# Altium PCB futong.PcbDoc (part 1 of 2)
Units mil, origin at the board's own origin, x right, y up, seen from the top; angles counter-clockwise.
Board outline 6000 x 4000 mil, 4 copper layers (Top Layer, Layer 1, Layer 2, Bottom Layer), stack 23.756 mil thick; 90 components, 158 nets, 637 pads, 325 vias.
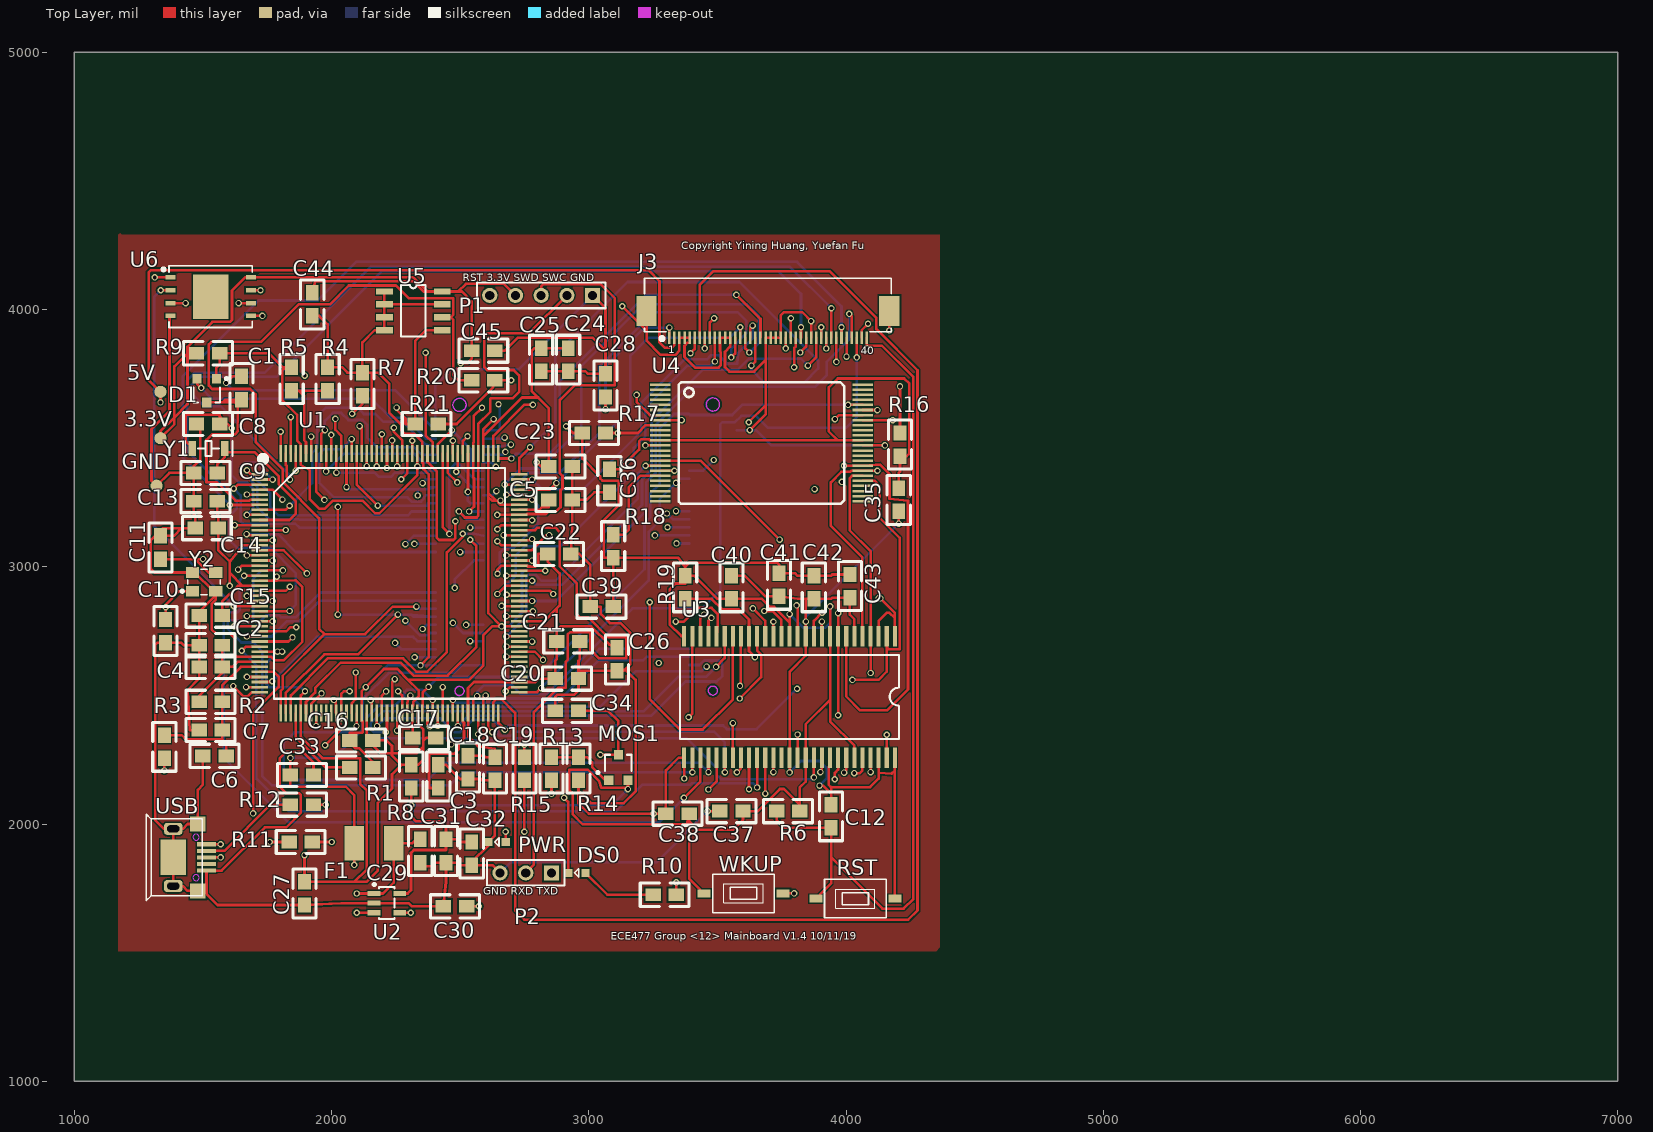
[diagram p0: Top Layer view]
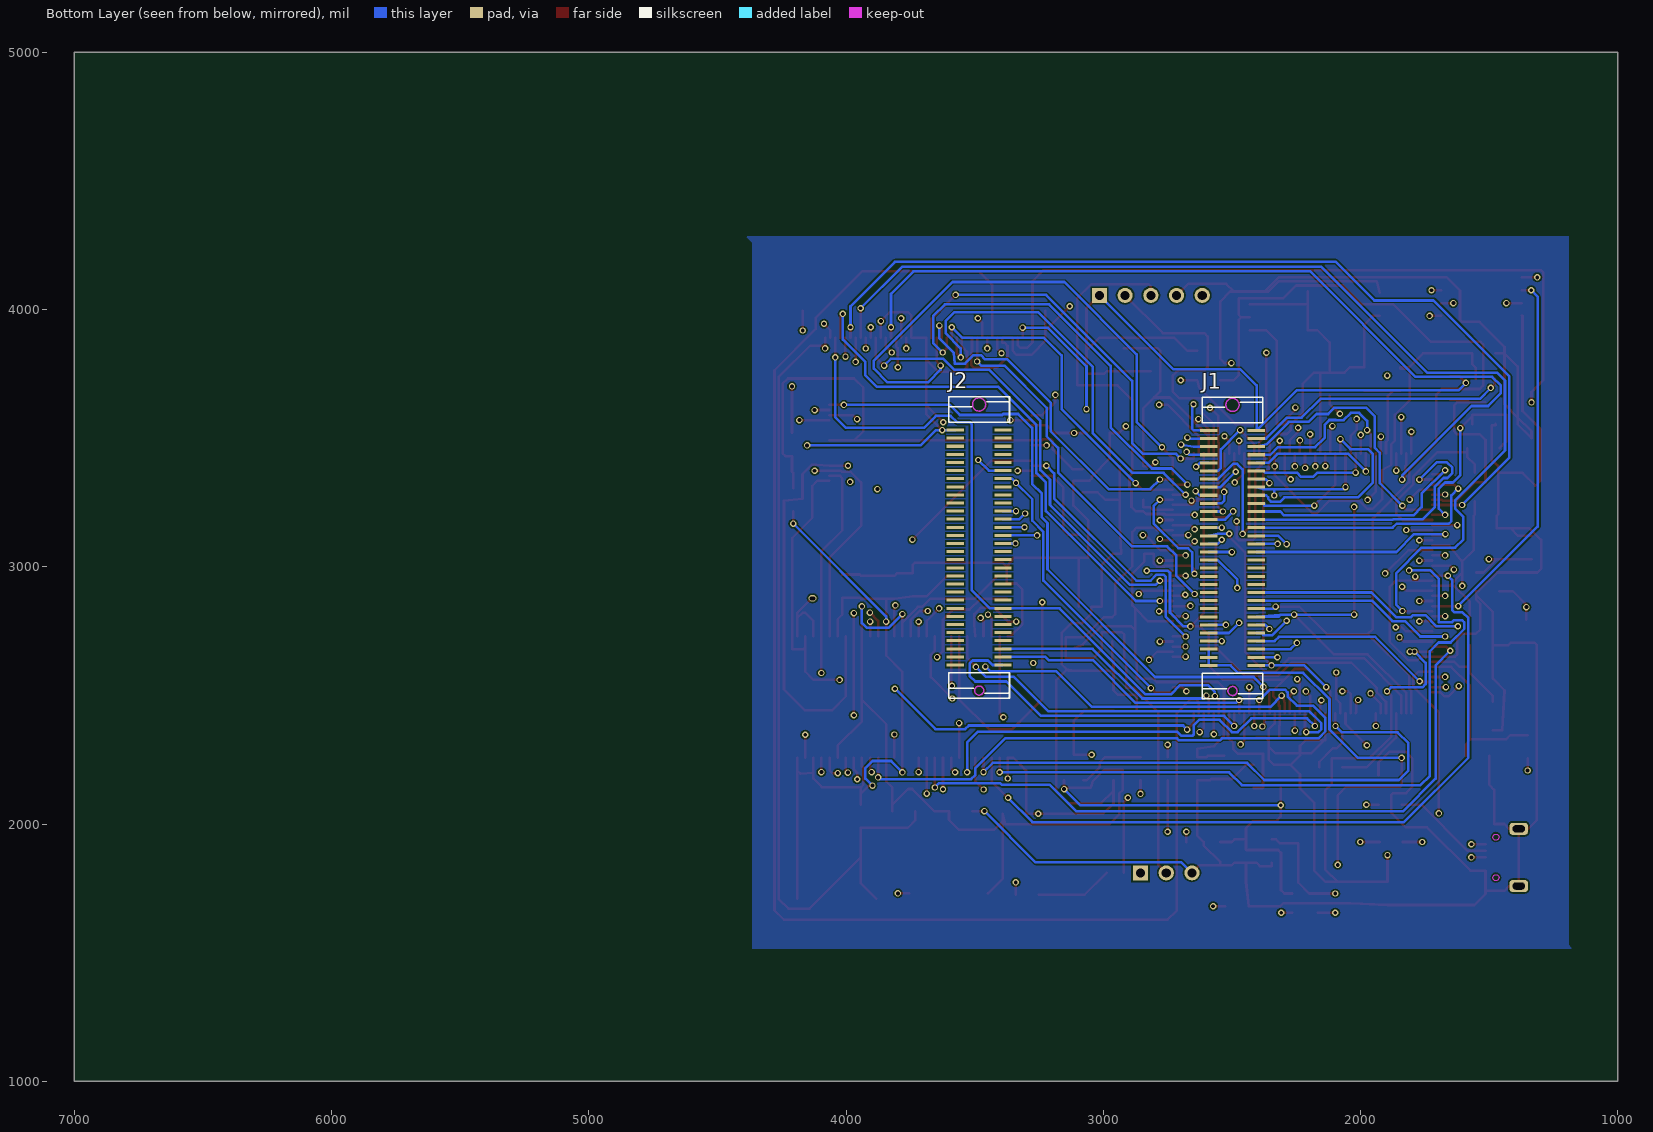
[diagram p1: Bottom Layer view, seen from below]
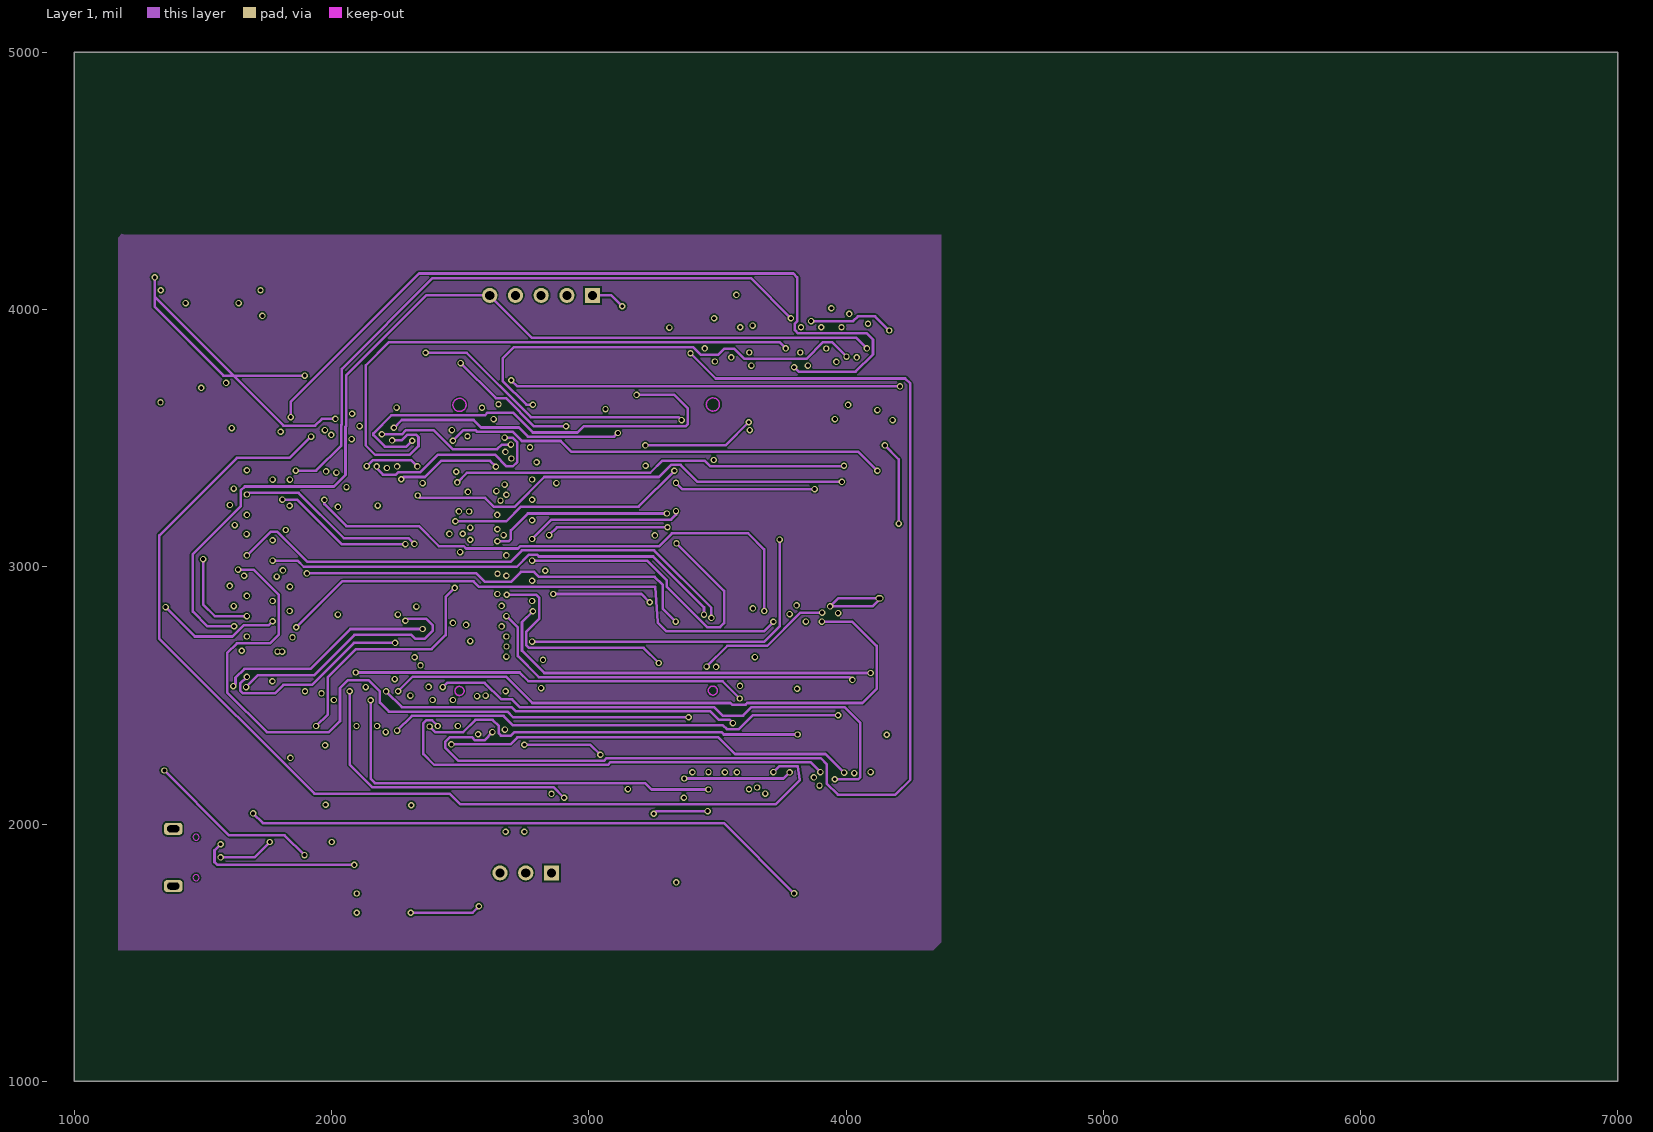
[diagram p2: Layer 1]
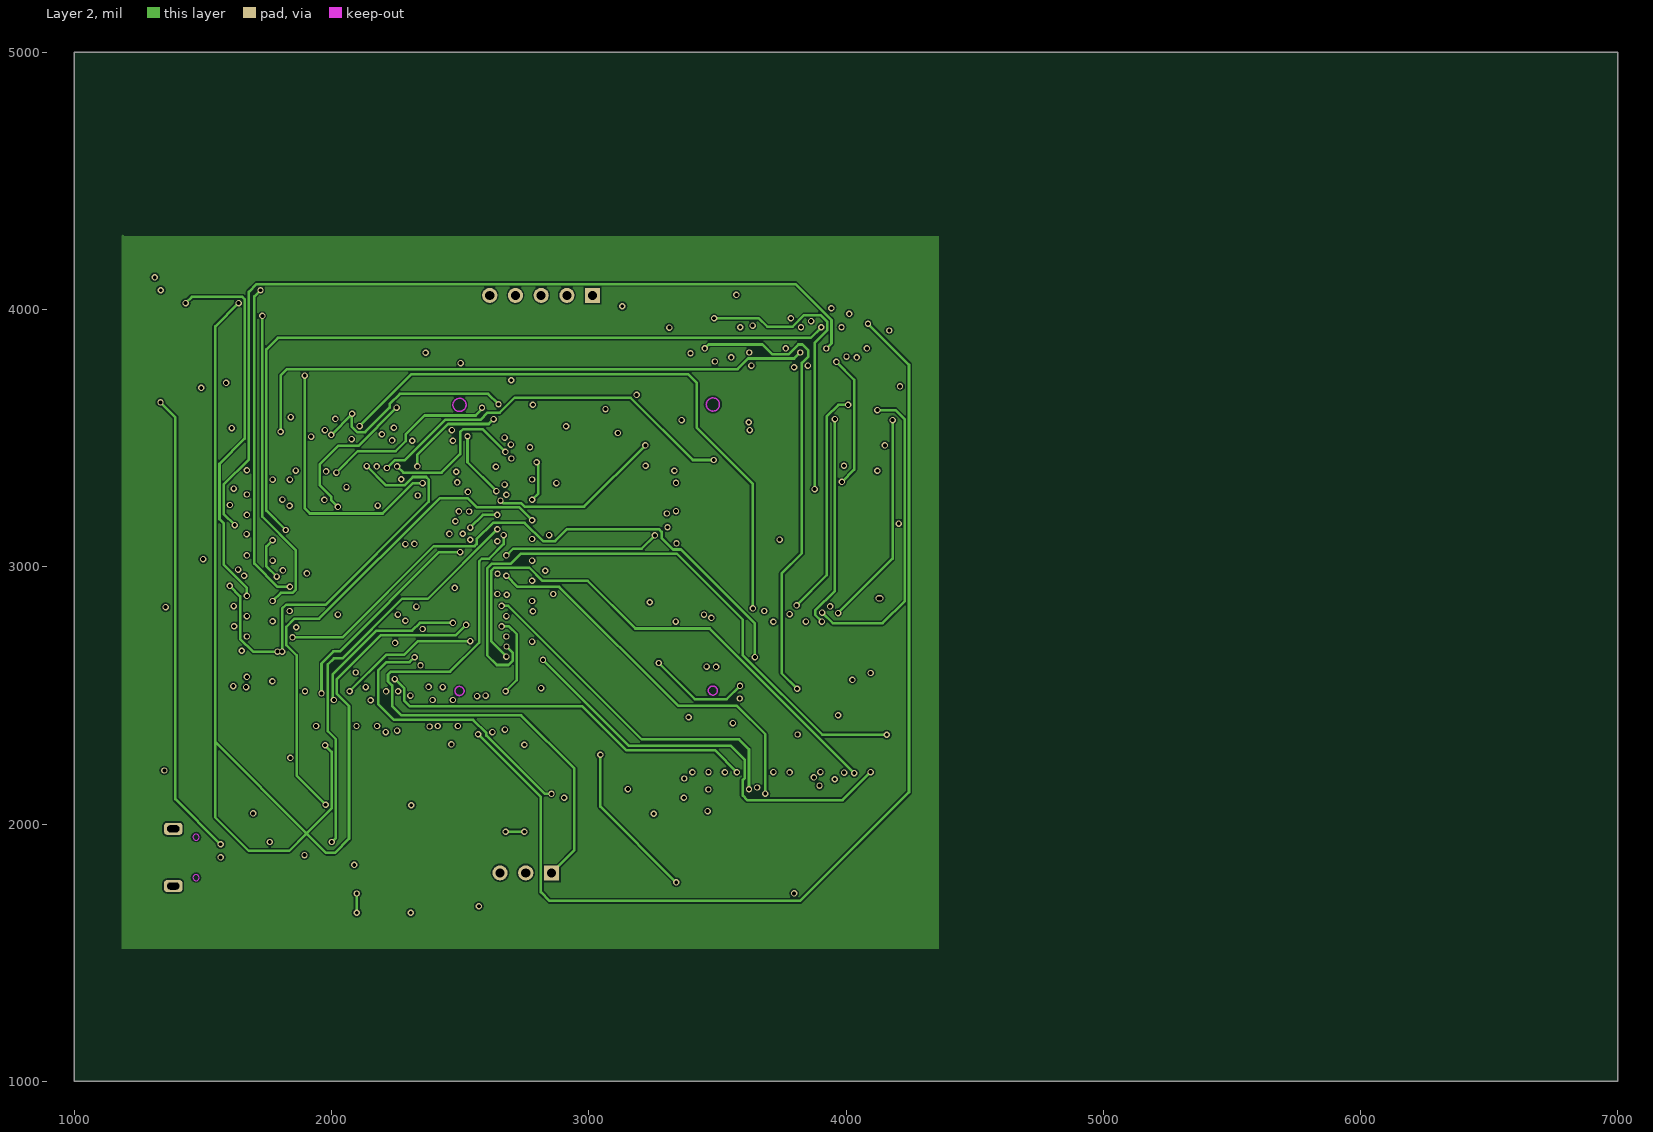
[diagram p3: Layer 2]

## Layer stack, top to bottom
Top Solder: solder mask 0.4, Solder Resist, Dk 3.5
Top Layer: signal copper 1.4
Dielectric 2: prepreg 2.8, PP-006, Dk 4.1
Layer 1: signal copper 1.3779
Dielectric 1: dielectric 12.6, FR-4, Dk 4.8
Layer 2: signal copper 1.3779
Dielectric 3: prepreg 2.8, PP-006, Dk 4.1
Bottom Layer: signal copper 1.4
Bottom Solder: solder mask 0.4, Solder Resist, Dk 3.5

## Board outline
1000,1000 7000,1000 7000,5000 1000,5000

## Design rules (kind name [scope] priority, off if disabled: settings)
Clearance [All] p1: gap=6 ignorepadtopadclearanceinfootprint=TRUE except(0: Arc-Hole Track-Hole SMDPad-Hole THPad-Hole Via-Hole Fill-Hole Poly-Hole Region-Hole Text-Hole)
ComponentClearance [All] p1 off: gap=10 collisioncheckmode=3 verticalgap=10 showdistances=FALSE
DiffPairsRouting [All] p1 off: maxlimit=10 minlimit=10 mostfreqgap=10 toplayer_minwidth=15 toplayer_maxwidth=15 toplayer_prefwidth=15 midlayer1_minwidth=15 midlayer1_maxwidth=15 midlayer1_prefwidth=15 midlayer2_minwidth=15 midlayer2_maxwidth=15 midlayer2_prefwidth=15 bottomlayer_minwidth=15 bottomlayer_maxwidth=15 bottomlayer_prefwidth=15 maxuncoupledlength=500
FanoutControl Fanout_BGA [IsBGA] p1 off: bgadir=Out bgaviamode=Centered fanoutstyle=Auto fanoutdirection=Alternating viagrid=1 // Fanout_BGA (Default Rule)
FanoutControl Fanout_LCC [IsLCC] p2 off: bgadir=Out bgaviamode=Centered fanoutstyle=Auto fanoutdirection=Alternating viagrid=1 // Fanout_LCC (Default Rule)
FanoutControl Fanout_SOIC [IsSOIC] p3 off: bgadir=Out bgaviamode=Centered fanoutstyle=Auto fanoutdirection=Alternating viagrid=1 // Fanout_SOIC (Default Rule)
FanoutControl Fanout_Small [(CompPinCount < 5)] p4 off: bgadir=Out bgaviamode=Centered fanoutstyle=Auto fanoutdirection=OutThenIn viagrid=1 // Fanout_Small (Default Rule)
FanoutControl Fanout_Default [All] p5 off: bgadir=Out bgaviamode=Centered fanoutstyle=Auto fanoutdirection=Alternating viagrid=1 // Fanout_Default (Default Rule)
Height [All] p1 off: minheight=0 maxheight=1000 prefheight=500
ParallelSegment ParallelSegment_1 [InNetClass('fmc') vs InNetClass('fmc')] p1: limit=10000 gap=10
ParallelSegment ParallelSegment_2 [InNetClass('qspi') vs InNetClass('qspi')] p2: limit=10000 gap=10
ParallelSegment [InNetClass('dcmi') vs InNetClass('dcmi')] p3: limit=10000 gap=10
ParallelSegment ParallelSegment_3 [InNetClass('spi4') vs InNetClass('spi4')] p4: limit=10000 gap=10
PolygonConnect [All] p1: connectstyle=Relief reliefconductorwidth=10 reliefentries=4 polygonreliefangle="90 Angle" airgapwidth=10
RoutingCorners [All] p1 off: cornerstyle=45-Degree minsetback=100 maxsetback=100
RoutingPriority [All] p1 off: routingpriority=0
RoutingTopology [All] p1 off: topology=Shortest
RoutingVias [All] p1: holewidth=15 width=25 viastyle="Through Hole" minholewidth=15 minwidth=25 maxholewidth=15 maxwidth=25
SMDToCorner [All] p1: distance=0
SolderMaskExpansion [All] p1: expansion=4
Width [All] p1: maxlimit=10 minlimit=10 preferedwidth=10
19 further rules are at their usual default settings.

## Classes and differential pairs
net class fmc: FMC_A0 FMC_A1 FMC_A2 FMC_A3 FMC_A4 FMC_A5 FMC_A6 FMC_A7 FMC_A8 FMC_A9 FMC_A10 FMC_A11 FMC_A12 FMC_A16_CLE FMC_A17_ALE FMC_BA0 FMC_BA1 FMC_D0 FMC_D1 FMC_D2 FMC_D3 FMC_D4 FMC_D5 FMC_D6 FMC_D7 FMC_D8 FMC_D9 FMC_D10 FMC_D11 FMC_D12 FMC_D13 FMC_D14 FMC_D15 FMC_NBL0 FMC_NBL1 FMC_NCE3 FMC_NE1 FMC_NOE FMC_NWAIT FMC_NWE FMC_SDCKE0 FMC_SDCLK FMC_SDNCAS FMC_SDNE0 FMC_SDNRAS FMC_SDNWE
net class spi4: PE2 PE4 PE5 PE6
net class qspi: PB2 PB6 PF6 PF7 PF8 PF9
net class dcmi: DCMI_D0 DCMI_D1 DCMI_D2 DCMI_D3 DCMI_D4 DCMI_D5 DCMI_D6 DCMI_D7 DCMI_HREF DCMI_PLCK DCMI_SCL DCMI_SDA DCMI_XCLK
component class stm: C1 C2 C3 C4 C5 C6 C7 C8 C9 C10 C11 C12 C13 C14 C15 C16 C17 C18 C19 C20 C21 C22 C23 C24 C25 C26 C27 D1 J1 J2 P1 R1 R2 R3 R4 R5 R6 R7 R8 R9 RST U1 Y1 Y2
component class mem: C35 C36 C37 C38 C39 C40 C41 C42 C43 C44 C45 R16 R17 R18 R19 R20 R21 U3 U4 U5 U6
component class circuit: 3.3V 5V C28 C29 C30 C31 C32 C33 C34 DS0 F1 GND J3 MOS1 P2 PWR R10 R11 R12 R13 R14 R15 U2 USB WKUP

## Components (designator, comment, footprint, x,y, rotation, side; value= is the part's Value field where it differs from the comment)
3.3V "TEST POINT" TP-1.5 1335,3500 r90 top
5V "TEST POINT" TP-1.5 1335,3680 r0 top
C1 "104" 0805 1649.94,3650 r90 top
C2 "104" 0805 1485,2695.06 r0 top
C3 "225" 0805 2415,2140 r90 top
C4 "225" 0805 1485,2611.05 r0 top
C5 "225" 0805 2845,3260.06 r0 top
C6 "10uF" 0805 1500,2265.06 r0 top
C7 "104" 0805 1485,2365.06 r0 top
C8 "6pF" 0805 1475,3555 r0 top
C9 "6pF" 0805 1465,3365.06 r0 top
C10 "22pF" 0805 1354.94,2705 r90 top
C11 "22pF" 0805 1335,3120 r270 top
C12 "104" 0805 3942.02,1985 r90 top
C13 "104" 0805 1464.94,3255 r0 top
C14 "104" 0805 1470,3150.06 r0 top
C15 "104" 0805 1485,2810.06 r0 top
C16 "104" 0805 2070,2325.06 r0 top
C17 "104" 0805 2315,2335.06 r0 top
C18 "104" 0805 2530,2175 r90 top
C19 "104" 0805 2634.94,2170 r90 top
C20 "104" 0805 2960,2564.94 r180 top
C21 "104" 0805 2965,2710 r180 top
C22 "104" 0805 2930,3049.94 r180 top
C23 "104" 0805 2935,3390 r180 top
C24 "104" 0805 2919.94,3760 r90 top
C25 "104" 0805 2815,3760 r90 top
C26 "104" 0805 3109.94,2595 r90 top
C27 "104" 0805 1894.94,1685 r90 top
C28 "104" 0805 3065,3750 r270 top
C29 "10uF" 0805 2344.94,1850 r90 top
C30 "103" 0805 2435,1680.06 r0 top
C31 "104" 0805 2444.94,1850 r90 top
C32 "10uF" 0805 2544.94,1840 r90 top
C33 "104" 0805 1840,2190.06 r0 top
C34 "104" 0805 2960,2439.94 r180 top
C35 "104" 0805 4204.94,3215 r90 top
C36 "104" 0805 3079.94,3289.37 r90 top
C37 "104" 0805 3509.53,2050.06 r0 top
C38 "104" 0805 3300,2040.06 r0 top
C39 "104" 0805 3005,2845.06 r0 top
C40 "104" 0805 3555.06,2965 r270 top
C41 "104" 0805 3739.98,2885 r90 top
C42 "104" 0805 3874.94,2875 r90 top
C43 "104" 0805 4015,2880 r90 top
C44 "104" 0805 1925.06,4065 r270 top
C45 "104" 0805 2545,3840.06 r0 top
D1 "BAT54C" SOT-23 1515,3690 r180 top
DS0 "LED" SMDLED-0603 2986.93,1810 r180 top
F1 "1812L075PR" *1812 2165,1925 r0 top
GND "TEST POINT" TP-1.5 1320,3315 r90 top
J1 "3710M060046G3FT01" 3710F060046G3FT01 2590,2616.54 r0 bottom
J2 "3710M060046G3FT01" 3710F060046G3FT01 3575.04,2618.07 r0 bottom
J3 "RGBLCD" FPC-TOP40 3313.19,3886 r0 top
MOS1 "SI2301" SO-G3/C2.5 3115,2220 r0 top
P1 "SWD" HDR1X5 3015,4055 r180 top
P2 "USART1" HDR1X3 2855,1810 r180 top
PWR "LED" SMDLED-0603 2676.93,1930 r180 top
R1 "10K" 0805 2070,2220.06 r0 top
R2 "10R" 0805 1485,2475.06 r0 top
R3 "10R" 0805 1350.06,2345 r270 top
R4 "0R" 0805 1984.94,3685 r90 top
R5 "0R" 0805 1844.87,3685 r90 top
R6 "10K" 0805 3730,2050 r0 top
R7 "100K" 0805 2119.94,3665 r90 top
R8 "0R" 0805 2309.94,2140 r90 top
R9 "0R" 0805 1475,3830 r0 top
R10 "1K" 0805 3340,1724.94 r180 top
R11 "10R" 0805 1925,1929.94 r180 top
R12 "10R" 0805 1930,2074.94 r180 top
R13 "10R" 0805 2854.94,2170 r90 top
R14 "100K" 0805 2959.94,2170 r90 top
R15 "1K" 0805 2749.94,2170 r90 top
R16 "0R" 0805 4209.94,3430 r90 top
R17 "10K" 0805 2975,3520.06 r0 top
R18 "10K" 0805 3095.06,3125 r270 top
R19 "10K" 0805 3375,2965 r270 top
R20 "4.7K" 0805 2545,3725.06 r0 top
R21 "4.7K" 0805 2325,3555.06 r0 top
RST "KEY_M" KEY_SOP3625 3882.91,1710 r0 top
U1 "STM32F767IGT6" LQFP176 1720.91,3358.98 r0 top
U2 "CAT6219-330TD" SOT-23-5 2165,1729.8 r0 top
U3 "W9825G6KH" TSOP54 4189.96,2730 r270 top
U4 "MT29F4G08" TSOP48 3277.6,3707.79 r0 top
U5 "24C02" SOP-8 2205.59,4070 r0 top
U6 "W25Q256" WSON8 1530,4050 r0 top
USB "USB-AB" "USB_AB - 5S - B" 1300,1870 r90 top
WKUP "KEY_UP" KEY_SOP3625 3755,1730 r180 top
Y1 "32.768KHz" XTAL3215 1459.02,3460 r0 top
Y2 "25Mhz" XTAL3225 1459.45,2905 r0 top

## Footprints (in the part's own frame and the unit in brackets; to place one, negate y for a bottom-side part, rotate by r counter-clockwise, add the part's x,y. Pads: shape width x height; smd on the part's side, far side on the other; paste and mask are expansions set on the pad)
0805 [mil]
  rect 60x50 smd: 1(0,-0.06) 2(90,-0.06)
  silkscreen extent -50,-45 140,45
3710F060046G3FT01 [mm]
  rect 1.7x0.3 smd: 1(-4.7,0) 2(-4.7,-0.8) 3(-4.7,-1.6) 4(-4.7,-2.4) 5(-4.7,-3.2) 6(-4.7,-4) 7(-4.7,-4.8) 8(-4.7,-5.6) 9(-4.7,-6.4) 10(-4.7,-7.2) 11(-4.7,-8) 12(-4.7,-8.8) 13(-4.7,-9.6) 14(-4.7,-10.4) 15(-4.7,-11.2) 16(-4.7,-12) 17(-4.7,-12.8) 18(-4.7,-13.6) 19(-4.7,-14.4) 20(-4.7,-15.2) 21(-4.7,-16) 22(-4.7,-16.8) 23(-4.7,-17.6) 24(-4.7,-18.4) 25(-4.7,-19.2) 26(-4.7,-20) 27(-4.7,-20.8) 28(-4.7,-21.6) 29(-4.7,-22.4) 30(-4.7,-23.2) 31(0,-23.2) 32(0,-22.4) 33(0,-21.6) 34(0,-20.8) 35(0,-20) 36(0,-19.2) 37(0,-18.4) 38(0,-17.6) 39(0,-16.8) 40(0,-16) 41(0,-15.2) 42(0,-14.4) 43(0,-13.6) 44(0,-12.8) 45(0,-12) 46(0,-11.2) 47(0,-10.4) 48(0,-9.6) 49(0,-8.8) 50(0,-8) 51(0,-7.2) 52(0,-6.4) 53(0,-5.6) 54(0,-4.8) 55(0,-4) 56(0,-3.2) 57(0,-2.4) 58(0,-1.6) 59(0,-0.8) 60(0,0)
  Keep-Out Layer circle w0.152: c-2.35,2.525 r0.45
  Keep-Out Layer circle w0.152: c-2.35,-25.725 r0.65
  silkscreen extent -5.35,-26.48 0.65,3.27
*1812 [mm]
  rect 1.9x3.4 smd: 1(-1.95,0) 2(1.95,0)
FPC-TOP40 [mm]
  rect 0.25x1.2 smd: 1(0,0.102) 2(0.5,0.102) 3(1,0.102) 4(1.5,0.102) 5(2,0.102) 6(2.5,0.102) 7(3,0.102) 8(3.5,0.102) 9(4,0.102) 10(4.5,0.102) 11(5,0.102) 12(5.5,0.102) 13(6,0.102) 14(6.5,0.102) 15(7,0.102) 16(7.5,0.102) 17(8,0.102) 18(8.5,0.102) 19(9,0.102) 20(9.5,0.102) 21(10,0.102) 22(10.5,0.102) 23(11,0.102) 24(11.5,0.102) 25(12,0.102) 26(12.5,0.102) 27(13,0.102) 28(13.5,0.102) 29(14,0.102) 30(14.5,0.102) 31(15,0.102) 32(15.5,0.102) 33(16,0.102) 34(16.5,0.102) 35(17,0.102) 36(17.5,0.102) 37(18,0.102) 38(18.5,0.102) 39(19,0.102) 40(19.5,0.102)
  rect 2x3 smd: A(-2.25,2.754) B(21.725,2.754)
  silkscreen extent -2.45,-0.15 21.92,5.97
HDR1X3 [mm]
  rect 1.5x1.5 hole 0.9: 1(0,0)
  round 1.5 hole 0.9: 2(2.54,0) 3(5.08,0)
  silkscreen extent -1.27,-1.27 6.35,1.27
HDR1X5 [mm]
  rect 1.5x1.5 hole 0.9: 1(0,0)
  round 1.5 hole 0.9: 2(2.54,0) 3(5.08,0) 4(7.62,0) 5(10.16,0)
  silkscreen extent -1.27,-1.27 11.43,1.27
KEY_SOP3625 [mm]
  rect 1.3x0.8 smd: 1(0,0) 2(7.8,0)
  silkscreen extent 0.85,-1.9 6.95,1.9
LQFP176 [mm]
  rect 1.65x0.254 smd: 1(0,0) 2(0,-0.5) 3(0,-1) 4(0,-1.5) 5(0,-2) 6(0,-2.5) 7(0,-3) 8(0,-3.5) 9(0,-4) 10(0,-4.5) 11(0,-5) 12(0,-5.5) 13(0,-6) 14(0,-6.5) 15(0,-7) 16(0,-7.5) 17(0,-8) 18(0,-8.5) 19(0,-9) 20(0,-9.5) 21(0,-10) 22(0,-10.5) 23(0,-11) 24(0,-11.5) 25(0,-12) 26(0,-12.5) 27(0,-13) 28(0,-13.5) 29(0,-14) 30(0,-14.5) 31(0,-15) 32(0,-15.5) 33(0,-16) 34(0,-16.5) 35(0,-17) 36(0,-17.5) 37(0,-18) 38(0,-18.5) 39(0,-19) 40(0,-19.5) 41(0,-20) 42(0,-20.5) 43(0,-21) 44(0,-21.5) 89(25.631,-21.5) 90(25.631,-21) 91(25.631,-20.5) 92(25.631,-20) 93(25.631,-19.5) 94(25.631,-19) 95(25.631,-18.5) 96(25.631,-18) 97(25.631,-17.5) 98(25.631,-17) 99(25.631,-16.5) 100(25.631,-16) 101(25.631,-15.5) 102(25.631,-15) 103(25.631,-14.5) 104(25.631,-14) 105(25.631,-13.5) 106(25.631,-13) 107(25.631,-12.5) 108(25.631,-12) 109(25.631,-11.5) 110(25.631,-11) 111(25.631,-10.5) 112(25.631,-10) 113(25.631,-9.5) 114(25.631,-9) 115(25.631,-8.5) 116(25.631,-8) 117(25.631,-7.5) 118(25.631,-7) 119(25.631,-6.5) 120(25.631,-6) 121(25.631,-5.5) 122(25.631,-5) 123(25.631,-4.5) 124(25.631,-4) 125(25.631,-3.5) 126(25.631,-3) 127(25.631,-2.5) 128(25.631,-2) 129(25.631,-1.5) 130(25.631,-1) 131(25.631,-0.5) 132(25.631,0)
  rect 0.254x1.65 smd: 45(2.065,-23.566) 46(2.566,-23.566) 47(3.066,-23.566) 48(3.565,-23.566) 49(4.066,-23.566) 50(4.565,-23.566) 51(5.066,-23.566) 52(5.565,-23.566) 53(6.066,-23.566) 54(6.565,-23.566) 55(7.066,-23.566) 56(7.565,-23.566) 57(8.066,-23.566) 58(8.565,-23.566) 59(9.066,-23.566) 60(9.565,-23.566) 61(10.066,-23.566) 62(10.565,-23.566) 63(11.066,-23.566) 64(11.565,-23.566) 65(12.066,-23.566) 66(12.565,-23.566) 67(13.066,-23.566) 68(13.565,-23.566) 69(14.066,-23.566) 70(14.565,-23.566) 71(15.066,-23.566) 72(15.566,-23.566) 73(16.066,-23.566) 74(16.566,-23.566) 75(17.065,-23.566) 76(17.566,-23.566) 77(18.065,-23.566) 78(18.566,-23.566) 79(19.065,-23.566) 80(19.566,-23.566) 81(20.065,-23.566) 82(20.566,-23.566) 83(21.065,-23.566) 84(21.566,-23.566) 85(22.065,-23.566) 86(22.566,-23.566) 87(23.065,-23.566) 88(23.566,-23.566) 133(23.566,2.065) 134(23.065,2.065) 135(22.566,2.065) 136(22.065,2.065) 137(21.566,2.065) 138(21.065,2.065) 139(20.566,2.065) 140(20.065,2.065) 141(19.566,2.065) 142(19.065,2.065) 143(18.566,2.065) 144(18.065,2.065) 145(17.566,2.065) 146(17.065,2.065) 147(16.566,2.065) 148(16.066,2.065) 149(15.566,2.065) 150(15.066,2.065) 151(14.565,2.065) 152(14.066,2.065) 153(13.565,2.065) 154(13.066,2.065) 155(12.565,2.065) 156(12.066,2.065) 157(11.565,2.065) 158(11.066,2.065) 159(10.565,2.065) 160(10.066,2.065) 161(9.565,2.065) 162(9.066,2.065) 163(8.565,2.065) 164(8.066,2.065) 165(7.565,2.065) 166(7.066,2.065) 167(6.565,2.065) 168(6.066,2.065) 169(5.565,2.065) 170(5.066,2.065) 171(4.565,2.065) 172(4.066,2.065) 173(3.565,2.065) 174(3.066,2.065) 175(2.566,2.065) 176(2.065,2.065)
  silkscreen extent 0.04,-22.15 24.22,1.82
SMDLED-0603 [mil]
  rect 32x32 smd: 1(0,0) 2(66.93,0)
  silkscreen extent 26,-17 42,17
SO-G3/C2.5 [mm]
  rect 0.9x0.95 smd: 1(-0.95,-1.25) 2(0.95,-1.25) 3(0,1.25)
  silkscreen extent -2.15,-0.63 1.3,1.25
SOP-8 [mil]
  rect 65x25 smd: 1(0,0) 2(0,-50) 3(0,-100) 4(0,-150) 5(224.41,-150) 6(224.41,-100) 7(224.41,-50) 8(224.41,0)
  silkscreen extent 65,-175 159,25
SOT-23 [mm]
  rect 0.9x0.95 smd: 1(-0.95,-1.048) 2(0.95,-1.048) 3(0,1.302)
  silkscreen extent -2.07,-1.17 1.3,1.3
SOT-23-5 [mil]
  rect 50x20 smd: 1(0,0) 2(0,-37.4) 3(0,-74.8) 4(100,-74.8) 5(100,0)
  silkscreen extent 0,-99 80,35
TP-1.5 [mm]
  round 1.2 smd: 1(0,0)
TSOP48 [mm]
  rect 2x0.25 smd: 1(0,0) 2(0,-0.5) 3(0,-1) 4(0,-1.5) 5(0,-2) 6(0,-2.5) 7(0,-3) 8(0,-3.5) 9(0,-4) 10(0,-4.5) 11(0,-5) 12(0,-5.5) 13(0,-6) 14(0,-6.5) 15(0,-7) 16(0,-7.5) 17(0,-8) 18(0,-8.5) 19(0,-9) 20(0,-9.5) 21(0,-10) 22(0,-10.5) 23(0,-11) 24(0,-11.5) 25(20,-11.5) 26(20,-11) 27(20,-10.5) 28(20,-10) 29(20,-9.5) 30(20,-9) 31(20,-8.5) 32(20,-8) 33(20,-7.5) 34(20,-7) 35(20,-6.5) 36(20,-6) 37(20,-5.5) 38(20,-5) 39(20,-4.5) 40(20,-4) 41(20,-3.5) 42(20,-3) 43(20,-2.5) 44(20,-2) 45(20,-1.5) 46(20,-1) 47(20,-0.5) 48(20,0)
  silkscreen extent 1.83,-11.75 18.17,0.25
TSOP54 [mm]
  rect 2x0.4 smd: 1(0,0) 2(0,-0.8) 3(0,-1.6) 4(0,-2.4) 5(0,-3.2) 6(0,-4) 7(0,-4.8) 8(0,-5.6) 9(0,-6.4) 10(0,-7.2) 11(0,-8) 12(0,-8.8) 13(0,-9.6) 14(0,-10.4) 15(0,-11.2) 16(0,-12) 17(0,-12.8) 18(0,-13.6) 19(0,-14.4) 20(0,-15.2) 21(0,-16) 22(0,-16.8) 23(0,-17.6) 24(0,-18.4) 25(0,-19.2) 26(0,-20) 27(0,-20.8) 28(12,-20.8) 29(12,-20) 30(12,-19.2) 31(12,-18.4) 32(12,-17.6) 33(12,-16.8) 34(12,-16) 35(12,-15.2) 36(12,-14.4) 37(12,-13.6) 38(12,-12.8) 39(12,-12) 40(12,-11.2) 41(12,-10.4) 42(12,-9.6) 43(12,-8.8) 44(12,-8) 45(12,-7.2) 46(12,-6.4) 47(12,-5.6) 48(12,-4.8) 49(12,-4) 50(12,-3.2) 51(12,-2.4) 52(12,-1.6) 53(12,-0.8) 54(12,0)
  silkscreen extent 1.83,-21.2 10.16,0.4
"USB_AB - 5S - B" [mm]
  rect 0.4x1.9 smd: 1(1.3,-5.436) 2(0.65,-5.436) 3(0,-5.436) 4(-0.65,-5.436) 5(-1.3,-5.436)
  rrect50% 1.2x1.8 hole 0.7 slot 1.2 at 90 deg: 6(2.825,-2.15) 7(-2.825,-2.15)
  rect 1.5x1.5 smd: 8(-3.302,-4.572) 9(3.302,-4.572)
  rect 3.5x2.5 smd: 9(0,-2.159)
  Keep-Out Layer circle w0.102: c-2,-4.4 r0.3
  Keep-Out Layer circle w0.102: c2,-4.4 r0.3
  silkscreen extent -4.26,-5 4.26,0.51
WSON8 [mm]
  rect 1x0.45 smd: 1(-3.975,1.905) 2(-3.975,0.635) 3(-3.975,-0.635) 4(-3.975,-1.905) 5(3.975,-1.905) 6(3.975,-0.635) 7(3.975,0.635) 8(3.975,1.905)
  rect 3.5x4.4 smd: 9(0,0)
  silkscreen extent -4.8,-3.05 4.1,3.05
XTAL3215 [mm]
  rect 0.75x1.5 smd: 1(0,0) 2(3.2,0)
  silkscreen extent -0.74,-0.75 3.94,0.75
XTAL3225 [mm]
  rect 1.3x1.05 smd: 1(0,0) 2(2.3,0) 3(2.3,1.85) 4(0,1.85)
  silkscreen extent -1.14,-0.33 2.74,2.17

## Part data
3.3V 5V GND: library part TEST-POINT, "测试点"
C1 C2 C3 C4 C5 C6 C7 C8 C9 C10 C11 C12 C13 C14 C15 C16 C17 C18 C19 C20 C21 C22 C23 C24 C25 C26 C27 C28 C29 C30 C31 C32 C33 C34 C35 C36 C37 C38 C39 C40 C41 C42 C43 C44 C45: library part C
D1: "双肖特基二极管"
F1: "PTC Resettable Fuse 0.75A_hold_ 1.5A_trip_ 13.2VDC 100A 0.8W 0.2s 0.1Ohm SMD Solder Pad 1812 T/R", Package="1812 Littelfuse", Availability=Unavailable, MF="Littelfuse Inc.", MP=1812L075PR, Price=None, SnapEDA_Link=https://www.snapeda.com/parts/1812L075PR/Littelfuse%20Inc./view-part/?ref=snap
J1 J2: library part 3710F, "3710F060046G3FT01"
J3: library part FPC-40, "FPC-40P-0.5mm"
MOS1: library part MOS-P, "IRLML6401/SI2301"
P1: library part "Header 5", "Header, 5-Pin", LatestRevisionDate=17-Jul-2002, LatestRevisionNote="Re-released for DXP Platform.", Publisher="Altium Limited"
P2: library part "Header 3", "Header, 3-Pin", LatestRevisionDate=17-Jul-2002, LatestRevisionNote="Re-released for DXP Platform.", Publisher="Altium Limited"
R1 R2 R3 R4 R5 R6 R7 R8 R9 R10 R11 R12 R13 R14 R15 R16 R17 R18 R19 R20 R21: library part R
U2: "3.3V 500mA LDO"
U3: library part IS42S16160B, "32MB SDRAM"
U4: library part K9F2G08U0C, "256MB NAND FLASH"
U5: library part 24C256, "EEPROM"
U6: library part W25Q128, "W25Q128"
USB: "MicroUSB"
WKUP: library part KEY_M
Y1: library part XTAL, "普通晶振"
Y2: library part XTAL_3225, "3225贴片无源晶振"

## Via types
v1: diameter 25, hole 15, Top Layer to Bottom Layer, 325 vias

## Nets (pads, with @x,y where several pads share a name; then routed paths per layer and width w, separated by ;. In a path a pad name is that pad's centre, name@x,y a point inside that pad or via, vN(x,y) a via of type N, cw(c..) or ccw(c..) an arc to the next point about the centre after c; other vN are vias at no path point)
BOOT0: J1.31 R7.1 U1.166 | length 1164.2
  Top Layer w10: U1.166@1999.08,3440.29 v1(1999.08,3512.58) ; v1(2080,3595) 2080,3593.5 2120,3633.5 R7.1@2120,3665
  Layer 2 w10: v1(1999.08,3512.58) 2080,3593.5 v1(2080,3595) 2083.55,3595 2077.82,3589.27 2077.82,3544.95 2099.27,3523.5 2130.5,3523.5 2225.8,3618.8 2225.8,3632 2265.8,3672 2609,3672 v1(2649,3632)
  Bottom Layer w10: J1.31@2590,3529.92 2647.88,3529.92 2653.95,3535.99 2653.95,3627.05 v1(2649,3632)
DCMI_D0: J2.16 U1.115 | length 1360.4
  Top Layer w10: U1.115@2730,3024.33 2779.67,3024.33 v1(2780,3024)
  Layer 1 w10: v1(2780,3024) 3226.92,3024 3303.59,2947.33 3303.59,2921.97 3460.06,2765.5 3510.55,2765.5 3526,2780.95 3526,2905.98 v1(3340.98,3091)
  Bottom Layer w10: v1(3340.98,3091) 3341.46,3090.51 J2.16@3390,3090.51
DCMI_D1: J2.17 U1.116 | length 792.3
  Top Layer w10: v1(2680,3044.02) U1.116@2730,3044.02
  Layer 2 w10: v1(2680,3044.02) 2705.98,3070 3204.99,3070 v1(3257,3122.01)
  Bottom Layer w10: v1(3257,3122.01) J2.17@3390,3122.01
DCMI_D2: J2.18 U1.117 | length 697.2
  Top Layer w10: U1.117@2730,3063.7 2776.7,3063.7 2836,3123 v1(2846,3123)
  Layer 1 w10: v1(2846,3123) 2876.5,3153.5 v1(3306,3153.5)
  Bottom Layer w10: v1(3306,3153.5) J2.18@3390,3153.5
DCMI_D3: J2.19 U1.118 | length 909.6
  Top Layer w10: v1(2645,3099) 2660.61,3083.39 U1.118@2730,3083.39
  Layer 1 w10: v1(2645,3099) 2688,3099 2697,3108 2697,3141 2763,3207 v1(3304,3207)
  Bottom Layer w10: v1(3304,3207) 3326,3185 J2.19@3390,3185
DCMI_D4: J1.39 U1.140 | length 391.9
  Top Layer w10: U1.140@2510.89,3440.29 2510.89,3489.47 v1(2528.71,3507.29)
  Layer 2 w10: v1(2528.71,3507.29) 2528.71,3406.24 v1(2641,3293.95)
  Bottom Layer w10: J1.39@2590,3277.95 2625,3277.95 v1(2641,3293.95)
DCMI_D5: J1.36 U1.145 | length 343.6
  Top Layer w10: U1.145@2412.46,3440.29 2412.46,3475.46 v1(2468,3531)
  Bottom Layer w10: v1(2468,3531) 2542.67,3456.33 2542.67,3384.33 2554.56,3372.44 J1.36@2590,3372.44
DCMI_D6: J1.26 U1.167 | length 538.1
  Top Layer w10: v1(1979,3371) 1979.39,3371.39 U1.167@1979.39,3440.29
  Bottom Layer w10: v1(1979,3371) 2047,3439 2322.94,3439 2358,3403.94 J1.26@2404.96,3403.94
DCMI_D7: J1.27 U1.168 | length 674.3
  Top Layer w10: U1.168@1959.71,3440.29 1959.71,3516.71 v1(1974,3531)
  Bottom Layer w10: v1(1974,3531) 1974,3567.23 2005.27,3598.5 2037.45,3598.5 2065.95,3570 2095.68,3570 2096.18,3570.5 2121.06,3570.5 2139.56,3552 2139.56,3501.44 2176,3465 2320.43,3465 2350,3435.43 J1.27@2404.96,3435.43
DCMI_HREF: J2.3 U1.85 | length 947.3
  Top Layer w10: U1.85@2589.63,2431.2 2589.63,2489.63 v1(2599,2499)
  Bottom Layer w10: v1(2599,2499) 2610.06,2487.94 2847.86,2487.94 3040.98,2681.06 J2.3@3390,2681.06
DCMI_PLCK: J1.47 U1.52 | length 1157.2
  Top Layer w10: v1(1940,2381) U1.52@1940.02,2431.2
  Layer 1 w10: v1(1940,2381) 1985.5,2426.5 1985.5,2570.65 2094.52,2679.67 2388.67,2679.67 2443.4,2734.4 2443.4,2882.38 v1(2478.78,2917.77)
  Bottom Layer w10: v1(2478.78,2917.77) 2478.78,2949.77 2555,3025.99 J1.47@2590,3025.99
DCMI_RESET: J1.25 J1.41 U1.138 U1.165 | length 1647.2
  Top Layer w10: v1(2018.76,3366) U1.165@2018.76,3440.29 ; v1(2535,3214.96) 2553.87,3233.83 2553.87,3343.38 2550.26,3347 U1.138@2550.26,3440.29 2550.26,3481.84 2552.21,3483.79 2552.21,3585.21 v1(2585,3618)
  Layer 2 w10: v1(2018.76,3366) 2101.76,3449 2249,3449 2288,3488 2288,3514 2362,3588 2560,3588 2585,3613 v1(2585,3618)
  Bottom Layer w10: v1(2018.76,3366) 2167.43,3366 2183.74,3349.69 2230.74,3349.69 2247.06,3366 2370.56,3366 2377,3372.44 J1.25@2404.96,3372.44 ; v1(2535,3214.96) J1.41@2590,3214.96
DCMI_SCL: J1.22 U1.162 | length 813.1
  Top Layer w10: U1.162@2077.82,3440.29 v1(2077.82,3496)
  Bottom Layer w10: v1(2077.82,3496) 2038.82,3457 1970,3457 1953,3440 1953,3326 2009.5,3269.5 2295.5,3269.5 2311.5,3253.5 2348,3253.5 2358.5,3264 2358.5,3269.5 2366.95,3277.95 J1.22@2404.96,3277.95
DCMI_SDA: J1.21 U1.161 | length 471.2
  Top Layer w10: U1.161@2097.5,3440.29 2097.5,3319.5 v1(2179.5,3237.5)
  Bottom Layer w10: v1(2179.5,3237.5) 2374.5,3237.5 2374.5,3246.46 J1.21@2404.96,3246.46
DCMI_XCLK: J2.20 U1.119 | length 715.2
  Top Layer w10: U1.119@2730,3103.07 2775.07,3103.07 v1(2780,3108)
  Layer 1 w10: v1(2780,3108) 2855.5,3183.5 3320,3183.5 3339,3202.5 v1(3339,3216.5)
  Bottom Layer w10: v1(3339,3216.5) J2.20@3390,3216.5
ETH_MDC: J1.9 U1.33 | length 841.7
  Top Layer w10: v1(1671,2729) 1671.05,2729.05 U1.33@1720.91,2729.05
  Bottom Layer w10: v1(1671,2729) 1767.02,2729 1826.52,2788.5 1875.5,2788.5 1955.5,2868.5 J1.9@2404.96,2868.5
ETH_MDIO: J1.4 U1.42 | length 763.6
  Top Layer w10: U1.42@1720.91,2551.89 1766.89,2551.89 v1(1770,2555)
  Bottom Layer w10: v1(1770,2555) 1942.5,2727.5 2317.52,2727.5 2334,2711.02 J1.4@2404.96,2711.02
FMC_A0: U1.16 U3.23 | length 2099.7
  Top Layer w10: U1.16@1720.91,3063.7 1814.3,3063.7 v1(1904,2974) ; v1(3338,2787) 3370,2787 3423,2840 3478,2840 3501,2817 3501,2776.95 U3.23@3497.05,2730
  Layer 1 w10: v1(1904,2974) 2563,2974 2595.9,2941.1 2697.1,2941.1 2736,2980 2787,2980 2806,2961 3256.35,2961 3286.81,2930.55 3286.81,2838.19 v1(3338,2787)
FMC_A1: U1.17 U3.24 | length 2167.8
  Top Layer w10: v1(1671,3044.02) U1.17@1720.91,3044.02 ; U3.24@3465.55,2730 3465.55,2789.55 v1(3476.98,2800.98)
  Layer 1 w10: v1(1671,3044.02) 1762.98,3136 1789.5,3136 1905.5,3020 2697,3020 2740.5,3063.5 3254.17,3063.5 3476.98,2840.69 v1(3476.98,2800.98)
FMC_A2: U1.18 U3.25 | length 1959.7
  Top Layer w10: U1.18@1720.91,3024.33 1770.67,3024.33 v1(1771,3024) ; U3.25@3434.05,2730 3434.05,2800.05 v1(3448,2814)
  Layer 1 w10: v1(1771,3024) 1868,3024 1892,3000 2720.5,3000 2768,3047.5 2798.5,3047.5 2806,3040 3249.9,3040 3448,2841.9 v1(3448,2814)
FMC_A3: U1.19 U3.26 | length 3248.9
  Top Layer w10: v1(1637,2989) 1652.65,3004.65 U1.19@1720.91,3004.65 ; v1(3388,2415) 3402.56,2429.56 U3.26@3402.56,2730
  Layer 1 w10: v1(1637,2989) 1697,2989 1795,2891 1795,2737 1760,2702 1632,2702 1594,2664 1594,2512 1749,2357 1990,2357 2033,2400 2033,2528 2064,2559 2144,2559 2188,2515 2188,2472 2223,2437 2684,2437 2706,2415 v1(3388,2415)
FMC_A4: U1.20 U3.29 | length 2938.6
  Top Layer w10: U1.20@1720.91,2984.96 1752,2984.96 1753.04,2986 v1(1811,2986) ; U3.29@3402.56,2257.56 3402.56,2201.44 v1(3403,2201)
  Bottom Layer w10: v1(1811,2986) 1728,2986 1695,2953 1695,2784.5 1644,2784.5 1636,2792.5 1605,2792.5 1596.5,2784 1596.5,2758.5 1649.5,2705.5 1696.5,2705.5 1730.5,2671.5 1730.5,2187.5 1767,2151 2461,2151 2511,2201 v1(3403,2201)
FMC_A5: U1.21 U3.30 | length 2934.8
  Top Layer w10: v1(1660,2965.28) U1.21@1720.91,2965.28 ; v1(3370,2101.95) 3434.05,2166 U3.30@3434.05,2257.56
  Bottom Layer w10: v1(1660,2965.28) 1644,2949.28 1644,2832 1635,2823 1603.5,2823 1580.5,2800 1580.5,2257.5 1831,2007 3275.05,2007 v1(3370,2101.95)
FMC_A6: U1.60 U3.31 | length 2232.4
  Top Layer w10: v1(2097,2381) 2097.5,2381.5 U1.60@2097.5,2431.2 ; v1(3465.55,2201.9) U3.31@3465.55,2257.56
  Bottom Layer w10: v1(2097,2381) 2072,2356 1856,2356 1814,2314 1814,2208 1851,2171 2374,2171 2441,2238 3429.45,2238 v1(3465.55,2201.9)
FMC_A7: U1.63 U3.32 | length 1823.9
  Top Layer w10: v1(2152,2481) 2156.56,2476.44 U1.63@2156.56,2431.2 ; v1(3465,2134) 3497.05,2166.05 U3.32@3497.05,2257.56
  Layer 1 w10: v1(2152,2481) 2152,2176 2169,2159 3219,2159 3244,2134 v1(3465,2134)
FMC_A8: U1.64 U3.33 | length 1699.1
  Top Layer w10: U1.64@2176.24,2431.2 2176.24,2381.76 v1(2177,2381) ; U3.33@3528.54,2257.56 3528.54,2201.46 v1(3529,2201)
  Bottom Layer w10: v1(2177,2381) 2207,2411 2424,2411 2478,2357 2500.28,2357 2547.78,2404.5 2627.52,2404.5 2648.81,2383.21 2648.81,2347.19 2652.5,2343.5 2697.18,2343.5 2711.68,2358 3488,2358 3529,2317 v1(3529,2201)
FMC_A9: U1.65 U3.34 | length 1624.4
  Top Layer w10: U1.65@2195.93,2431.2 2195.93,2499.26 v1(2212,2515.33) ; U3.34@3560.04,2257.56 v1(3560.04,2392)
  Layer 1 w10: v1(2212,2515.33) 2273.33,2454 2700.08,2454 2715.58,2438.5 3471.5,2438.5 3504.5,2405.5 3546.54,2405.5 v1(3560.04,2392)
FMC_A10: U1.66 U3.22 | length 1729.3
  Top Layer w10: v1(2211,2357) 2215.61,2361.61 U1.66@2215.61,2431.2 ; v1(3495,2611) 3528.54,2644.54 U3.22@3528.54,2730
  Bottom Layer w10: v1(2211,2357) 2163.5,2357 2152.5,2368 2152.5,2392 2199.5,2439 3214,2439 3347.37,2572.37 3456.37,2572.37 v1(3495,2611)
FMC_A11: U1.67 U3.35 | length 1706.8
  Top Layer w10: U1.67@2235.3,2431.2 2235.3,2459.83 2235.5,2459.83 2235.5,2552.5 v1(2246,2563) ; v1(3576,2201) 3591.53,2216.53 U3.35@3591.53,2257.56
  Layer 2 w10: v1(2246,2563) 2283,2526 2283,2479 2304,2458 2974,2458 3145,2287 3490,2287 v1(3576,2201)
FMC_A12: U1.106 U3.36 | length 1540
  Top Layer w10: v1(2661,2848) 2661.83,2847.17 U1.106@2730,2847.17 ; v1(3623.03,2135) U3.36@3623.03,2257.56
  Layer 2 w10: v1(2661,2848) 2687,2848 3206,2329 3584,2329 3623.03,2289.97 v1(3623.03,2135)
FMC_A16_CLE: U1.99 U4.16 | length 1965.7
  Top Layer w10: U1.99@2730,2709.37 2779.63,2709.37 v1(2780,2709) ; U4.16@3277.6,3412.52 3435,3412.52 v1(3742,3105.52)
  Layer 1 w10: v1(2780,2709) 3683,2709 3742,2768 v1(3742,3105.52)
FMC_A17_ALE: U1.100 U4.17 | length 1089.7
  Top Layer w10: v1(2680,2729) 2680.05,2729.05 U1.100@2730,2729.05 ; v1(3220.76,3392.83) U4.17@3277.6,3392.83
  Bottom Layer w10: v1(2680,2729) 2756.5,2805.5 2756.5,2960 2765.59,2969.09 2792.5,2969.09 2816,2945.59 2871.13,2945.59 3190.92,3265.38 3190.92,3363 v1(3220.76,3392.83)
FMC_BA0: U1.108 U3.20 | length 1521.2
  Top Layer w10: v1(2681,2891) 2685.46,2886.54 U1.108@2730,2886.54 ; v1(3588,2537) 3591.53,2540.53 U3.20@3591.53,2730
  Layer 1 w10: v1(2681,2891) 2796,2891 2807,2880 2807,2797.5 2756.5,2747 2756.5,2696 2767.5,2685 3213,2685 v1(3272,2626)
  Layer 2 w10: v1(3272,2626) 3413,2485 3536,2485 v1(3588,2537)
FMC_BA1: U1.109 U3.21 | length 1567.8
  Top Layer w10: U1.109@2730,2906.22 2849.78,2906.22 v1(2862,2894) ; v1(3237,2862) 3237,2485.07 3354.57,2367.5 3442.75,2367.5 3560.04,2484.79 U3.21@3560.04,2730
  Layer 1 w10: v1(2862,2894) 3205,2894 v1(3237,2862)
FMC_D0: U1.104 U3.2 U4.29 | length 2644
  Top Layer w10: v1(2680,2808) 2680.21,2807.79 U1.104@2730,2807.79 ; v1(4025,2560) 4126.46,2560 4158.46,2592 4158.46,2688 ; U4.29@4065,3333.78 4112,3333.78 4131.22,3314.56 4131.22,3189.78 4209,3112 4209,2679 4167.46,2679 4158.46,2688 ; U3.2@4158.46,2730 4158.46,2688
  Layer 1 w10: v1(2680,2808) 2724,2764 2724,2652.63 2805.63,2571 4014,2571 v1(4025,2560)
FMC_D1: U1.105 U3.4 U4.30 | length 2460.5
  Top Layer w10: U1.105@2730,2827.48 2782.52,2827.48 v1(2783,2827) ; U4.30@4065,3353.46 4023.46,3353.46 4014,3344 4014,3142 4095.47,3060.53 U3.4@4095.47,2730 v1(4095.47,2587)
  Layer 1 w10: v1(2783,2827) 2740.5,2784.5 2740.5,2674 2827.5,2587 v1(4095.47,2587)
FMC_D2: U1.142 U3.5 U4.31 | length 2631
  Top Layer w10: U1.142@2471.52,3440.29 2471.52,3489.52 v1(2472,3490) ; U3.5@4063.98,2730 4063.98,3036 3941,3158.98 3941,3328 3982.33,3369.33 4017,3369.33 4020.82,3373.15 U4.31@4065,3373.15 4121.85,3373.15 v1(4122,3373)
  Layer 1 w10: v1(2472,3490) 2513,3531 2560,3531 2565.5,3525.5 2703.13,3525.5 2739.63,3489 2891,3489 2933,3447 4048,3447 v1(4122,3373)
FMC_D3: U1.143 U3.7 U4.32 | length 3299.2
  Top Layer w10: U1.143@2451.83,3440.29 2451.83,3365.17 v1(2489,3328) ; v1(3992.13,3392.83) U4.32@4065,3392.83 4116,3397 4132,3397 4169,3360 4169,3264 4241,3256 4241,2523 4160,2442 4054.98,2442 4000.98,2496 U3.7@4000.98,2730
  Layer 1 w10: v1(2489,3328) 2526.5,3365.5 3239.01,3365.5 3286.01,3412.5 3450.5,3412.5 3472,3391 3990.3,3391 v1(3992.13,3392.83)
FMC_D4: U1.68 U3.8 U4.41 | length 3201.3
  Top Layer w10: v1(2254.98,2363) U1.68@2254.98,2431.2 ; v1(3969.49,2423) U3.8@3969.49,2730 v1(3969.49,2820) ; U4.41@4065,3570 v1(4181,3570)
  Layer 1 w10: v1(2254.98,2363) 2312.48,2420.5 2668.5,2420.5 2705.5,2383.5 3521.54,2383.5 3536.54,2368.5 3583.54,2368.5 3638.04,2423 v1(3969.49,2423)
  Layer 2 w10: v1(3969.49,2820) 4181,3031.51 v1(4181,3570)
FMC_D5: U1.69 U3.10 U4.42 | length 3465.1
  Top Layer w10: v1(2259,2516) 2274.67,2500.33 U1.69@2274.67,2431.2 ; U3.10@3906.5,2730 v1(3906.5,2787) ; v1(3957,3574) 3972.68,3589.68 U4.42@4065,3589.68
  Layer 1 w10: v1(2259,2516) 2315.77,2572.77 2678.23,2572.77 2780.5,2470.5 3550.5,2470.5 3557,2464 3610,2464 3616.5,2470.5 4064,2470.5 4119,2525.5 4119,2692 4024,2787 v1(3906.5,2787)
  Layer 2 w10: v1(3906.5,2787) 3880,2813.5 3880,2829.5 3957,2906.5 v1(3957,3574)
FMC_D6: U1.70 U3.11 U4.43 | length 3206.5
  Top Layer w10: U1.70@2294.35,2431.2 2294.35,2468.35 2300.68,2493.18 v1(2306.5,2499) ; U3.11@3875,2730 3875,2790 v1(3907,2822) ; U4.43@4065,3609.37 4121.63,3609.37 v1(4122,3609)
  Layer 1 w10: v1(3458,2612) 3539,2693 3694,2693 3823,2822 v1(3907,2822)
  Layer 2 w10: v1(3907,2822) 3948.5,2780.5 4142.5,2780.5 4229,2867 4229,3572 4192,3609 v1(4122,3609)
  Bottom Layer w10: v1(2306.5,2499) 2350.5,2455 3044,2455 3183,2594 3440,2594 v1(3458,2612)
FMC_D7: U1.73 U3.13 U4.44 | length 3550
  Top Layer w10: U1.73@2353.41,2431.2 2353.41,2458.68 2354.5,2458.68 2354.5,2510.5 v1(2377.27,2533.27) ; v1(3808.01,2850) 3812.01,2846 U3.13@3812.01,2730 ; v1(4008,3629.05) U4.44@4065,3629.05
  Layer 2 w10: v1(3808.01,2850) 3925,2966.99 3925,3584 3970.05,3629.05 v1(4008,3629.05)
  Bottom Layer w10: v1(2377.27,2533.27) 2415.58,2571.58 2797.9,2571.58 3216.64,2990.32 3216.64,3169.95 3238.92,3192.23 3238.92,3285.19 3276.33,3322.6 3276.33,3539.42 3330.92,3594 3389,3594 3393,3590 3557.55,3590 3596.6,3629.05 v1(4008,3629.05)
FMC_D8: U1.74 U3.42 | length 1656.7
  Top Layer w10: U1.74@2373.09,2431.2 2373.09,2386.91 v1(2381,2379) ; U3.42@3812.01,2257.56 v1(3812.01,2348)
  Layer 1 w10: v1(2381,2379) 2403,2357 2512,2357 2559.5,2404.5 2625.76,2404.5 2650.18,2380.07 2650.18,2352 2658.68,2343.5 2697.18,2343.5 2710.68,2357 3516.04,2357 3525.04,2348 v1(3812.01,2348)
FMC_D9: U1.75 U3.44 | length 2347.3
  Top Layer w10: U1.75@2392.78,2431.2 v1(2392.78,2482) ; v1(3875,2181) U3.44@3875,2257.56
  Bottom Layer w10: v1(2392.78,2482) 2352.28,2522.5 2293.5,2522.5 2283,2512 2283,2496 2246.83,2459.83 2183.83,2459.83 2136.5,2412.5 2136.5,2360.5 2164,2333 2538.94,2333 2546.44,2325.5 2705.68,2325.5 2713.18,2333 3381.4,2333 3497,2217.4 3497,2191 3513.5,2174.5 3868.5,2174.5 v1(3875,2181)
FMC_D10: U1.76 U3.45 | length 1879.6
  Top Layer w10: U1.76@2412.46,2431.2 2412.46,2381.54 v1(2413,2381) ; v1(3900.5,2201.5) 3906.5,2207.49 U3.45@3906.5,2257.56
  Layer 1 w10: v1(2413,2381) 2391.5,2402.5 2367.5,2402.5 2357,2392 2357,2272 2399.29,2229.71 3074.71,2229.71 3085.19,2240.19 3861.81,2240.19 v1(3900.5,2201.5)
FMC_D11: U1.77 U3.47 | length 2226
  Top Layer w10: U1.77@2432.15,2431.2 v1(2432.15,2532) ; v1(3956.39,2174) 3956.39,2198.59 3969.49,2211.69 U3.47@3969.49,2257.56
  Layer 1 w10: v1(2432.15,2532) 2449.15,2549 2595.4,2549 2660.03,2484.38 2701.7,2484.38 2731.58,2454.5 3487.5,2454.5 3520.5,2421.5 3599.54,2421.5 3632.54,2454.5 3993.5,2454.5 4056,2392 4056,2182 4048,2174 v1(3956.39,2174)
FMC_D12: U1.78 U3.48 | length 1783.4
  Top Layer w10: U1.78@2451.83,2431.2 2451.83,2323.62 v1(2465.95,2309.5) ; v1(3992.5,2199.93) 4000.98,2208.41 U3.48@4000.98,2257.56
  Layer 1 w10: v1(2465.95,2309.5) 2695.18,2309.5 2722.68,2337 3504.04,2337 3568.85,2272.19 3920.24,2272.19 v1(3992.5,2199.93)
FMC_D13: U1.96 U3.50 | length 2240.7
  Top Layer w10: v1(2680,2651) 2680.69,2650.31 U1.96@2730,2650.31 ; v1(4032,2197.98) 4053.95,2197.98 4063.98,2208 U3.50@4063.98,2257.56
  Layer 2 w10: v1(2680,2651) 2621,2710 2621,2985.15 2632,2996.15 2768.85,2996.15 2819.54,2945.46 2996.04,2945.46 3181.5,2760 3469.98,2760 v1(4032,2197.98)
FMC_D14: U1.97 U3.51 | length 1798.6
  Top Layer w10: U1.97@2730,2670 2790,2670 v1(2822,2638) ; v1(4095.47,2201.47) U3.51@4095.47,2257.56
  Layer 2 w10: v1(2822,2638) 3156,2304 3552.57,2304 3607.03,2249.54 3607.03,2179.03 3599,2171 3599,2110 3616,2093 3987,2093 v1(4095.47,2201.47)
FMC_D15: U1.98 U3.53 | length 2613.7
  Top Layer w10: v1(2680.32,2690) 2680.63,2689.68 U1.98@2730,2689.68 ; U3.53@4158.46,2257.56 v1(4158.46,2347)
  Layer 2 w10: v1(2680.32,2690) 2704,2666.32 2704,2634 2688,2618 2643,2618 2605,2656 2605,2993.42 2624,3012.42 2697.42,3012.42 2736,3051 3342,3051 3599.03,2793.97 3599.03,2655.84 3907.87,2347 v1(4158.46,2347)
FMC_NBL0: U1.169 U3.15 | length 2425.8
  Top Layer w10: U1.169@1940.02,3440.29 1940.02,3291.98 v1(1972,3260) ; v1(3682,2828) 3714,2828 3749.01,2792.99 U3.15@3749.01,2730
  Layer 1 w10: v1(1972,3260) 1972,3244 2058,3158 2339.26,3158 2416.76,3080.5 2514,3080.5 2523.5,3071 2724.5,3071 2733,3079.5 3272.5,3079.5 3323,3130 3620,3130 3682,3068 v1(3682,2828)
FMC_NBL1: U1.170 U3.39 | length 4225
  Top Layer w10: U1.170@1920.34,3440.29 v1(1920.34,3506) ; U3.39@3717.52,2257.56 3717.52,2202.48 v1(3718,2202)
  Layer 1 w10: v1(1920.34,3506) 1837.34,3423 1632,3423 1331,3122 1331,2720 1933,2118 2459,2118 2500,2077 3727,2077 3821,2171 3812.81,2224.19 3740.19,2224.19 v1(3718,2202)
FMC_NCE3: R17.2 U1.152 U4.9 | length 1253.7
  Top Layer w10: v1(2242.67,3540.16) 2242.67,3524.16 2274.67,3492.16 U1.152@2274.67,3440.29 ; R17.2@3065,3520 v1(3113,3520) 3190.69,3520 3221,3550.31 U4.9@3277.6,3550.31
  Layer 1 w10: v1(2242.67,3540.16) 2273.01,3570.5 2552.5,3570.5 2581.5,3541.5 2728.26,3541.5 2763.79,3505.97 3098.97,3505.97 v1(3113,3520)
FMC_NE1: J1.35 U1.151 | length 572.5
  Top Layer w10: v1(2271,3340) 2294.35,3363.35 U1.151@2294.35,3440.29
  Layer 1 w10: v1(2271,3340) 2280,3349 2363,3349 2426,3412 2616,3412 v1(2639,3389)
  Bottom Layer w10: J1.35@2590,3403.94 2624.06,3403.94 v1(2639,3389)
FMC_NOE: U1.146 U4.8 | length 1589.7
  Top Layer w10: v1(2366,3832) 2366,3511 2392.78,3484.22 U1.146@2392.78,3440.29 ; U4.8@3277.6,3570 v1(3361,3570)
  Layer 1 w10: v1(2366,3832) 2525,3832 2775.27,3581.73 3349.27,3581.73 v1(3361,3570)
FMC_NWAIT: U1.150 U4.7 | length 1958
  Top Layer w10: U1.150@2314.04,3440.29 v1(2314.04,3490) ; v1(3186,3668) 3186,3641 3237.32,3589.68 U4.7@3277.6,3589.68
  Layer 1 w10: v1(2314.04,3490) 2291.04,3467 2208,3467 2163,3512 2163,3518.96 2233.04,3589 2596.96,3589 2606.95,3598.99 2706.01,3598.99 2783,3522 2956,3522 2980,3546 3376,3546 3385,3555 3385,3616 3333,3668 v1(3186,3668)
FMC_NWE: U1.147 U4.18 | length 1474.9
  Top Layer w10: U1.147@2373.09,3440.29 2373.09,3406.91 2409.5,3370.5 2409.5,3112.5 2418,3104 2473.5,3104 2481.5,3112 v1(2481.5,3177) ; U4.18@3277.6,3373.15 3332.85,3373.15 v1(3333,3373)
  Layer 1 w10: v1(2481.5,3177) 2680,3177 2737,3234 3194,3234 v1(3333,3373)
FMC_SDCKE0: U1.35 U3.37 | length 2764.8
  Top Layer w10: v1(1651,2673.68) 1667,2689.68 U1.35@1720.91,2689.68 ; v1(3654.53,2142) U3.37@3654.53,2257.56
  Bottom Layer w10: v1(1651,2673.68) 1708,2616.68 1708,2176 1835.07,2048.93 3103.93,2048.93 3208,2153 3395,2153 3400.5,2158.5 3638.03,2158.5 v1(3654.53,2142)
FMC_SDCLK: U1.112 U3.38 | length 1681.8
  Top Layer w10: v1(2680,2965.28) U1.112@2730,2965.28 ; v1(3686.02,2118) U3.38@3686.02,2257.56
  Layer 2 w10: v1(2680,2965.28) 2723.19,2922.09 2885,2922.09 3348.09,2459 3576,2459 3686.02,2348.98 v1(3686.02,2118)
FMC_SDNCAS: U1.160 U3.17 | length 2614
  Top Layer w10: v1(2109,3547) 2117.19,3538.81 U1.160@2117.19,3440.29 ; v1(3638,2838) 3686.02,2789.98 U3.17@3686.02,2730
  Layer 2 w10: v1(2109,3547) 2311,3749 3386,3749 3420,3715 3420,3540 3638,3322 v1(3638,2838)
FMC_SDNE0: R19.2 U1.34 U3.19 | length 2909.5
  Top Layer w10: U1.34@1720.91,2709.37 1832.37,2709.37 v1(1848.37,2725.37) ; R19.2@3374.94,2875 3478,2875 3519,2834 3584,2834 3623.03,2794.97 U3.19@3623.03,2730 3623.03,2671.97 v1(3646,2649)
  Layer 2 w10: v1(1848.37,2725.37) 2042.27,2725.37 2397.4,3080.5 2556.55,3080.5 2564.05,3088 2564.05,3107.05 2628,3171 2751,3171 2822.5,3099.5 2869.5,3099.5 2916,3146 3273.53,3146 3283.53,3136 3283.53,3111.48 3328,3067.01 3357.99,3067.01 3646,2779 v1(3646,2649)
FMC_SDNRAS: U1.59 U3.18 | length 1982.1
  Top Layer w10: U1.59@2077.82,2431.2 2077.82,2468.82 2094,2485 v1(2094,2589) ; v1(3587,2488) 3670,2571 3670,2658.53 3654.53,2674 U3.18@3654.53,2730
  Layer 1 w10: v1(2094,2589) 2731,2589 2765,2555 3520,2555 v1(3587,2488)
FMC_SDNWE: U1.32 U3.16 | length 2300
  Top Layer w10: U1.32@1720.91,2748.74 1824,2748.74 1840.26,2765 v1(1863,2765) ; U3.16@3717.52,2730 v1(3717.52,2786)
  Layer 1 w10: v1(1863,2765) 2041,2943 2552,2943 2573,2922 3258,2922 3268,2784 3303,2749 3680.52,2749 v1(3717.52,2786)
GBC_KEY: J1.15 U1.13 | length 816.4
  Top Layer w10: v1(1670,3127) 1674.24,3122.76 U1.13@1720.91,3122.76
  Bottom Layer w10: v1(1670,3127) 1791,3127 1860.52,3057.48 J1.15@2404.96,3057.48
GBC_LED: J1.45 U1.50 | length 1331.4
  Top Layer w10: U1.50@1900.65,2431.2 1900.65,2475 1936.25,2510.6 1936.25,2528 2035.88,2627.63 2268.1,2627.63 2319.13,2576.6 2451.6,2576.6 2563,2688 2563,3080.98 v1(2539,3104.98)
  Bottom Layer w10: v1(2539,3104.98) 2555,3088.98 J1.45@2590,3088.98